# Altium PCB lab4.PcbDoc
Units mil, origin at the board's own origin, x right, y up, seen from the top; angles counter-clockwise.
Board outline 3500 x 2000 mil, 2 copper layers (Top Layer, Bottom Layer); 15 components, 20 nets, 90 pads, 0 vias.
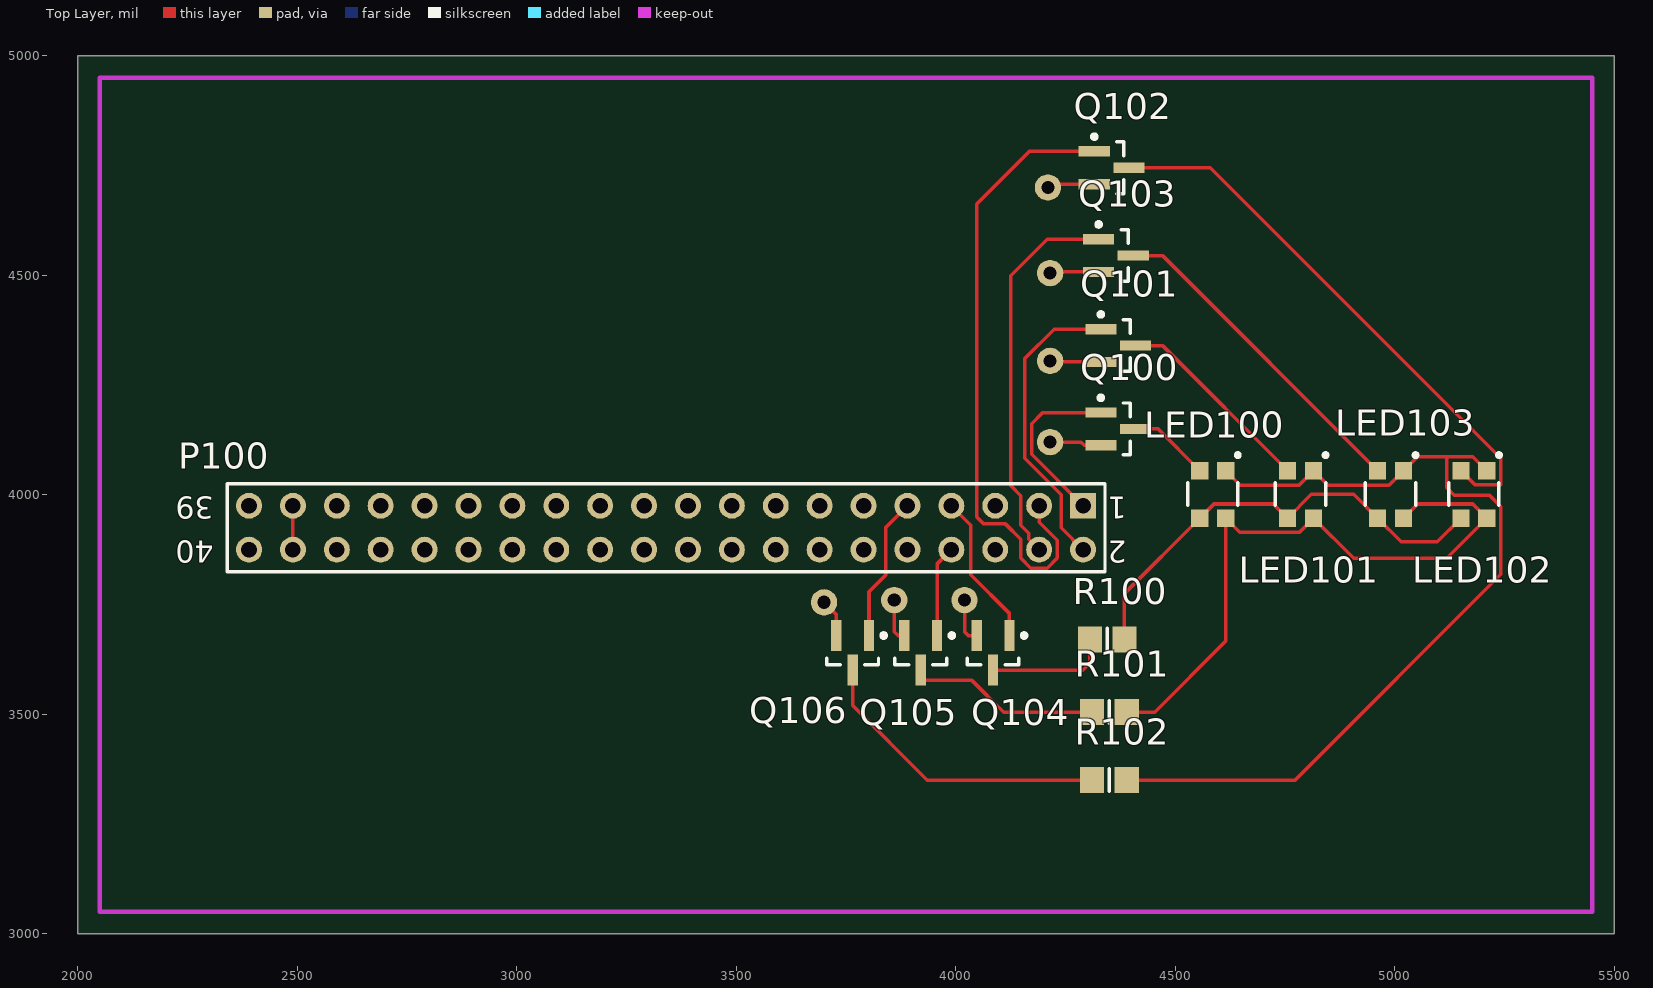
[diagram p0: Top Layer view]
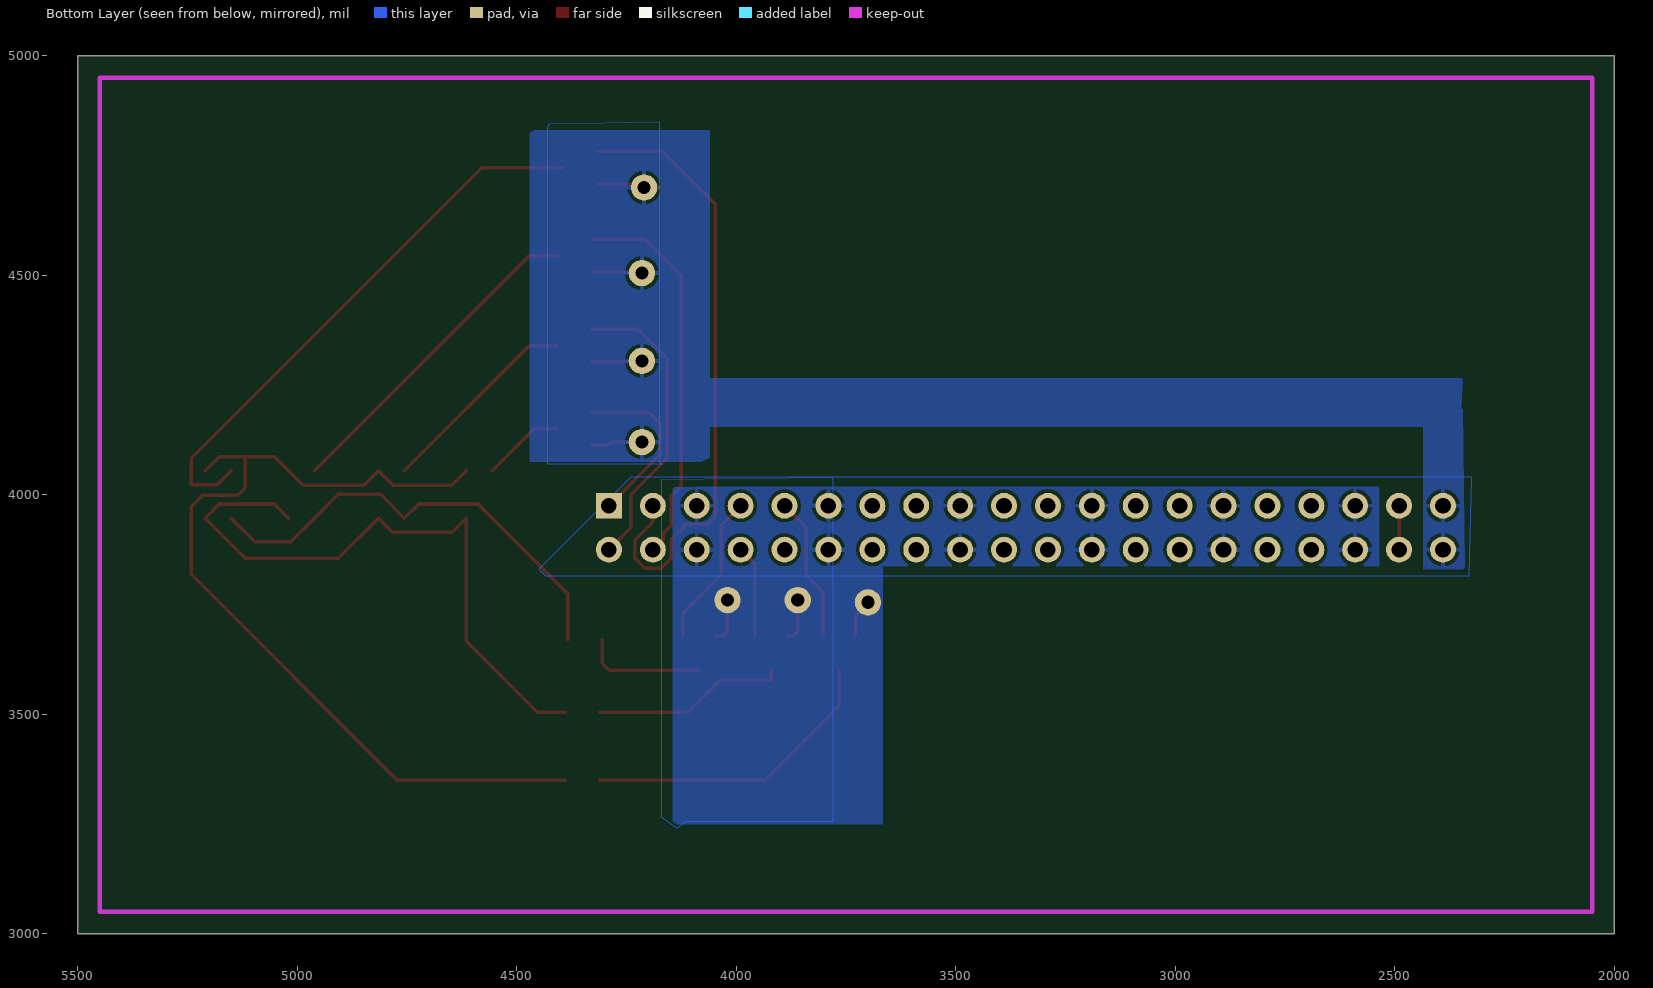
[diagram p1: Bottom Layer view, seen from below]

## Layer stack, top to bottom
Top Layer: signal copper 1.4
Dielectric: dielectric 12.6, FR-4, Dk 4.8
Bottom Layer: signal copper 1.4

## Board outline
2000,3000 5500,3000 5500,5000 2000,5000

## Design rules (kind name [scope] priority, off if disabled: settings)
Clearance [All] p1: gap=8
PolygonConnect [All] p1: connectstyle=Relief reliefconductorwidth=10 reliefentries=4 polygonreliefangle="90 Angle"
RoutingVias [All] p1: holewidth=25 width=40 viastyle="Through Hole" minholewidth=28 minwidth=50 maxholewidth=28 maxwidth=50
SilkscreenOverComponentPads [All] p1: minsilkscreentomaskgap=10
SolderMaskExpansion [All] p1: expansion=4
Width [All] p1: maxlimit=8 minlimit=8 preferedwidth=8
27 further rules are at their usual default settings.

## Components (designator, comment, footprint, x,y, rotation, side; value= is the part's Value field where it differs from the comment)
LED100 "CLV1A-FKB" PLCC4 4615,4055 r270 top
LED101 "CLV1A-FKB" PLCC4 4815,4055 r270 top
LED102 "CLV1A-FKB" PLCC4 5210,4055 r270 top
LED103 "CLV1A-FKB" PLCC4 5020,4055 r270 top
P100 "Header 20X2" HDR2X20 4290,3975 r180 top
Q100 "FDN306P" SOT23-3M 4370,4150 r0 top
Q101 "FDN306P" SOT23-3M 4370,4340 r0 top
Q102 "FDN306P" SOT23-3M 4355,4745 r0 top
Q103 "FDN306P" SOT23-3M 4365,4545 r0 top
Q104 "FDN339AN" SOT23-3M 4085,3640 r270 top
Q105 "FDN339AN" SOT23-3M 3920,3640 r270 top
Q106 "FDN339AN" SOT23-3M 3765,3640 r270 top
R100 "Res3" RESC2012M 4345,3670 r0 top
R101 "Res3" RESC2012M 4350,3505 r0 top
R102 "Res3" RESC2012M 4350,3350 r0 top

## Footprints (in the part's own frame and the unit in brackets; to place one, negate y for a bottom-side part, rotate by r counter-clockwise, add the part's x,y. Pads: shape width x height; smd on the part's side, far side on the other; paste and mask are expansions set on the pad)
HDR2X20 [mm] "Connector; Header; 20x2 Position"
  rect 1.5x1.5 hole 0.9: 1(0,0)
  round 1.5 hole 0.9: 2(0,2.54) 3(2.54,0) 4(2.54,2.54) 5(5.08,0) 6(5.08,2.54) 7(7.62,0) 8(7.62,2.54) 9(10.16,0) 10(10.16,2.54) 11(12.7,0) 12(12.7,2.54) 13(15.24,0) 14(15.24,2.54) 15(17.78,0) 16(17.78,2.54) 17(20.32,0) 18(20.32,2.54) 19(22.86,0) 20(22.86,2.54) 21(25.4,0) 22(25.4,2.54) 23(27.94,0) 24(27.94,2.54) 25(30.48,0) 26(30.48,2.54) 27(33.02,0) 28(33.02,2.54) 29(35.56,0) 30(35.56,2.54) 31(38.1,0) 32(38.1,2.54) 33(40.64,0) 34(40.64,2.54) 35(43.18,0) 36(43.18,2.54) 37(45.72,0) 38(45.72,2.54) 39(48.26,0) 40(48.26,2.54)
  silkscreen extent -1.27,-1.27 49.53,3.81
PLCC4 [mm] "RGB - Cree CLV1A-FKB"
  rect 1x1 smd: 1(0,0) 2(0,-1.5) 3(2.75,-1.5) 4(2.75,0)
  silkscreen extent -1,-2.2 2,0.8
RESC2012M [mm] "Chip Resistor, Body 2.0x1.2mm, IPC Low Density"
  rect 1.4x1.5 smd: 1(-1,0) 2(1,0)
  silkscreen extent 0,-0.65 0,0.65, body extent -1.07,-0.7 1.07,0.7, height 0.7
SOT23-3M [mm] "SOT23, 3-Leads, Body 2.9x1.3mm, Pitch 0.95mm, Lead Span 2.5mm, IPC Low Density"
  rect 1.8x0.6 smd: 1(-1,0.95) 2(-1,-0.95) 3(1,0)
  silkscreen extent -1.12,-1.5 0.7,1.92, body extent -0.7,-1.5 0.7,1.5, height 1.1

## Part data
P100: "Header, 20-Pin, Dual row"
Q100 Q101 Q102 Q103: library part FDN304P, "Pch MOSFET"
Q104 Q105 Q106: "Nch MOSFET"
R100 R101 R102: "Resistor"

## Free pads (board coordinates)
  round 60 hole 30: 0(3700,3755) 1(3860,3760) 2(4020,3760) 3(4210,4700) 4(4215,4505) 5(4215,4305) 6(4215,4120)

## Nets (pads, with @x,y where several pads share a name; then routed paths per layer and width w, separated by ;. In a path a pad name is that pad's centre, name@x,y a point inside that pad or via, vN(x,y) a via of type N, cw(c..) or ccw(c..) an arc to the next point about the centre after c; other vN are vias at no path point)
3V3: P100.37 P100.38 | length 100
  Top Layer w8: P100.38 P100.37
5V: P100.39 P100.40 pad.3 pad.4 pad.5 pad.6 Q100.2 Q101.2 Q102.2 Q103.2 | length 455.8
  Top Layer w8: pad.3 4217.6,4707.6 Q102.2 ; pad.6 4285.3,4120 4292.7,4112.6 Q100.2 ; pad.5 4217.4,4302.6 Q101.2 ; pad.4 4217.6,4507.6 Q103.2
GND: P100.5 P100.6 P100.11 P100.12 P100.17 P100.18 P100.23 P100.24 P100.29 P100.30 P100.35 P100.36 pad.0 pad.1 pad.2 Q104.2 Q105.2 Q106.2 | length 288.4
  Top Layer w8: pad.0 3727.6,3727.4 Q106.2 ; pad.1 3860,3688 3868.63,3679.37 Q105.2 ; pad.2 4020,3688 4028.63,3679.37 Q104.2
NetLED100_1: LED100.1 LED101.1 LED102.1 LED103.1 R102.2 | length 2088.9
  Top Layer w8: R102.2 4773,3350 5242,3819 5242,3973 5216,3999 5136,3999 5119,4016 5119,4087 ; LED100.1 4648,4022 4782,4022 LED101.1 4848,4022 4987,4022 LED103.1 5052,4087 5119,4087 ; LED102.1 5178,4087 5119,4087
NetLED100_2: LED100.2 Q100.3 | length 185.9
  Top Layer w8: Q100.3 4460.94,4150 LED100.2
NetLED100_3: LED100.3 LED101.3 LED102.3 LED103.3 R100.2 | length 1059.2
  Top Layer w8: R100.2 4384.37,3775.16 LED100.3 4588.21,3979 4723.68,3979 LED101.3 4810.21,4001 4906.68,4001 LED103.3 5014.89,3892.79 5097,3892.79 LED102.3
NetLED100_4: LED100.4 LED101.4 LED102.4 LED103.4 R101.2 | length 1486.5
  Top Layer w8: R101.2 4453,3505 4615,3667 LED100.4 4646.73,3915 4783.27,3915 LED101.4 4906.73,3855 5118.27,3855 LED102.4 5177.73,3979 5052.27,3979 LED103.4
NetLED101_2: LED101.2 Q101.3 | length 464.6
  Top Layer w8: Q101.3 4470.94,4340 LED101.2
NetLED102_2: LED102.2 Q102.3 | length 1286.2
  Top Layer w8: Q102.3 4580,4745 5242,4083 5242,4023 5182.94,4023 LED102.2
NetLED103_2: LED103.2 Q103.3 | length 759.5
  Top Layer w8: Q103.3 4470.94,4545 LED103.2
NetQ104_2: Q104.3 R100.1 | length 281.9
  Top Layer w8: Q104.3 4085,3600 4289.63,3600 4305.63,3616 R100.1
NetQ105_2: Q105.3 R101.1 | length 444.1
  Top Layer w8: Q105.3 3920,3577 4037,3577 4109,3505 R101.1
NetQ106_2: Q106.3 R102.1 | length 696.7
  Top Layer w8: Q106.3 3765,3520 3935,3350 R102.1
PIO_0: P100.1 Q100.1 | length 403.6
  Top Layer w8: P100.1 4173,4092 4173,4162 4198.4,4187.4 Q100.1
PIO_1: P100.2 Q101.1 | length 691.9
  Top Layer w8: P100.2 4240,3925 4240,4000 4157,4083 4157,4310.4 4224,4377.4 Q101.1
PIO_2: P100.3 Q102.1 | length 1432.8
  Top Layer w8: P100.3 4190,3937.53 4231.53,3896 4231.53,3856 4208.53,3833 4171,3833 4148,3856 4148,3898.8 4113.32,3933.47 4064,3933.47 4048,3949.47 4048,4662.4 4168,4782.4 Q102.1
PIO_3: P100.4 Q103.1 | length 886.1
  Top Layer w8: P100.4 4166.15,3898.85 4166.15,3912.03 4147.8,3930.39 4147.8,3998.2 4125,4021 4125,4499 4208.4,4582.4 Q103.1
PIO_4: P100.7 Q104.1 | length 350.5
  Top Layer w8: P100.7 4034,3931 4034,3818 4122.4,3729.6 Q104.1
PIO_5: P100.8 Q105.1 | length 209.1
  Top Layer w8: Q105.1 3957.4,3842.4 P100.8
PIO_6: P100.9 Q106.1 | length 331.9
  Top Layer w8: Q106.1 3802.4,3779.4 3840,3817 3840,3925 P100.9
pads on no net: P100.10 P100.13 P100.14 P100.15 P100.16 P100.19 P100.20 P100.21 P100.22 P100.25 P100.26 P100.27 P100.28 P100.31 P100.32 P100.33 P100.34

## Polygon pours and split planes (outlines as drawn)
5V on Bottom Layer "Top Layer-No Net" (solid, shelved, pour order 22): 4175,4850 4175,4075 4170,4070 4430,4070 4430,4840 4425,4845
GND on Bottom Layer "Top Layer-No Net" (solid, shelved, pour order 18): 3780,4040 3780,3255 4115.26,3255 4135.79,3240 4170,3265 4170,4035
GND on Bottom Layer "Top Layer-No Net" (solid, shelved, pour order 8): 2325,4040 4240,4040 4450,3830 4435,3815 2330,3815
GND on Bottom Layer "Top Layer-No Net" (solid, pour order 26): 4145,4017.74 4145,3255 4134.11,3250 3665.89,3250 3665.89,4010 3655,4015
GND on Bottom Layer "Top Layer-No Net" (solid, pour order 28): 4141.44,4017.7 4145,4014.14 4145,3837.15 2537.15,3837.15 2535,3835 2535,4020
5V on Bottom Layer "Top Layer-No Net" (solid, pour order 32): 4060,4830 4460.24,4830 4470,4825.25 4470,4075 4079.52,4075 4060,4084.5
5V on Bottom Layer "Top Layer-No Net" (solid, pour order 42): 2340,3835 2345,3830 2435,3830 2435,4175 2450,4190 2445,4195 2345,4195
5V on Bottom Layer "Top Layer-No Net" (solid, pour order 44): 2350.22,4155 4140,4155 4129.56,4165 4129.56,4265 2350.22,4265 2345,4270

## Keep-outs
Keep-Out Layer:
  lines w10: 2050,3050 5450,3050 5450,4950 2050,4950 2050,3050

## Silkscreen, mask and mechanical layers (free items; w line width, h text height)
Drill Drawing:
  text ".LEGEND" at 1965,2840 h60
  text "Drill Drawing." at 1965,2740 h60

## Dimensions
2050,3050 to 5450,3050 on Mechanical 1
2050,3050 to 2050,4950 on Mechanical 1

## Text inside footprints (layer, text, board x,y; h text height)
P100: Top Overlay "39" at 2310,3995 h50 r180; Top Overlay "40" at 2310,3895 h50 r180; Top Overlay "2" at 4390,3895 h50 r180; Top Overlay "1" at 4390,3995 h50 r180